# Altium PCB GSMBoard_SIM900_v2.PcbDoc
Units mm, origin at the board's own origin, x right, y up, seen from the top; angles counter-clockwise.
Board outline 39 x 39 mm, 2 copper layers (Top Layer, Bottom Layer); 39 components, 37 nets, 203 pads, 47 vias.
Unrouted connection lines stored in the file: 75.
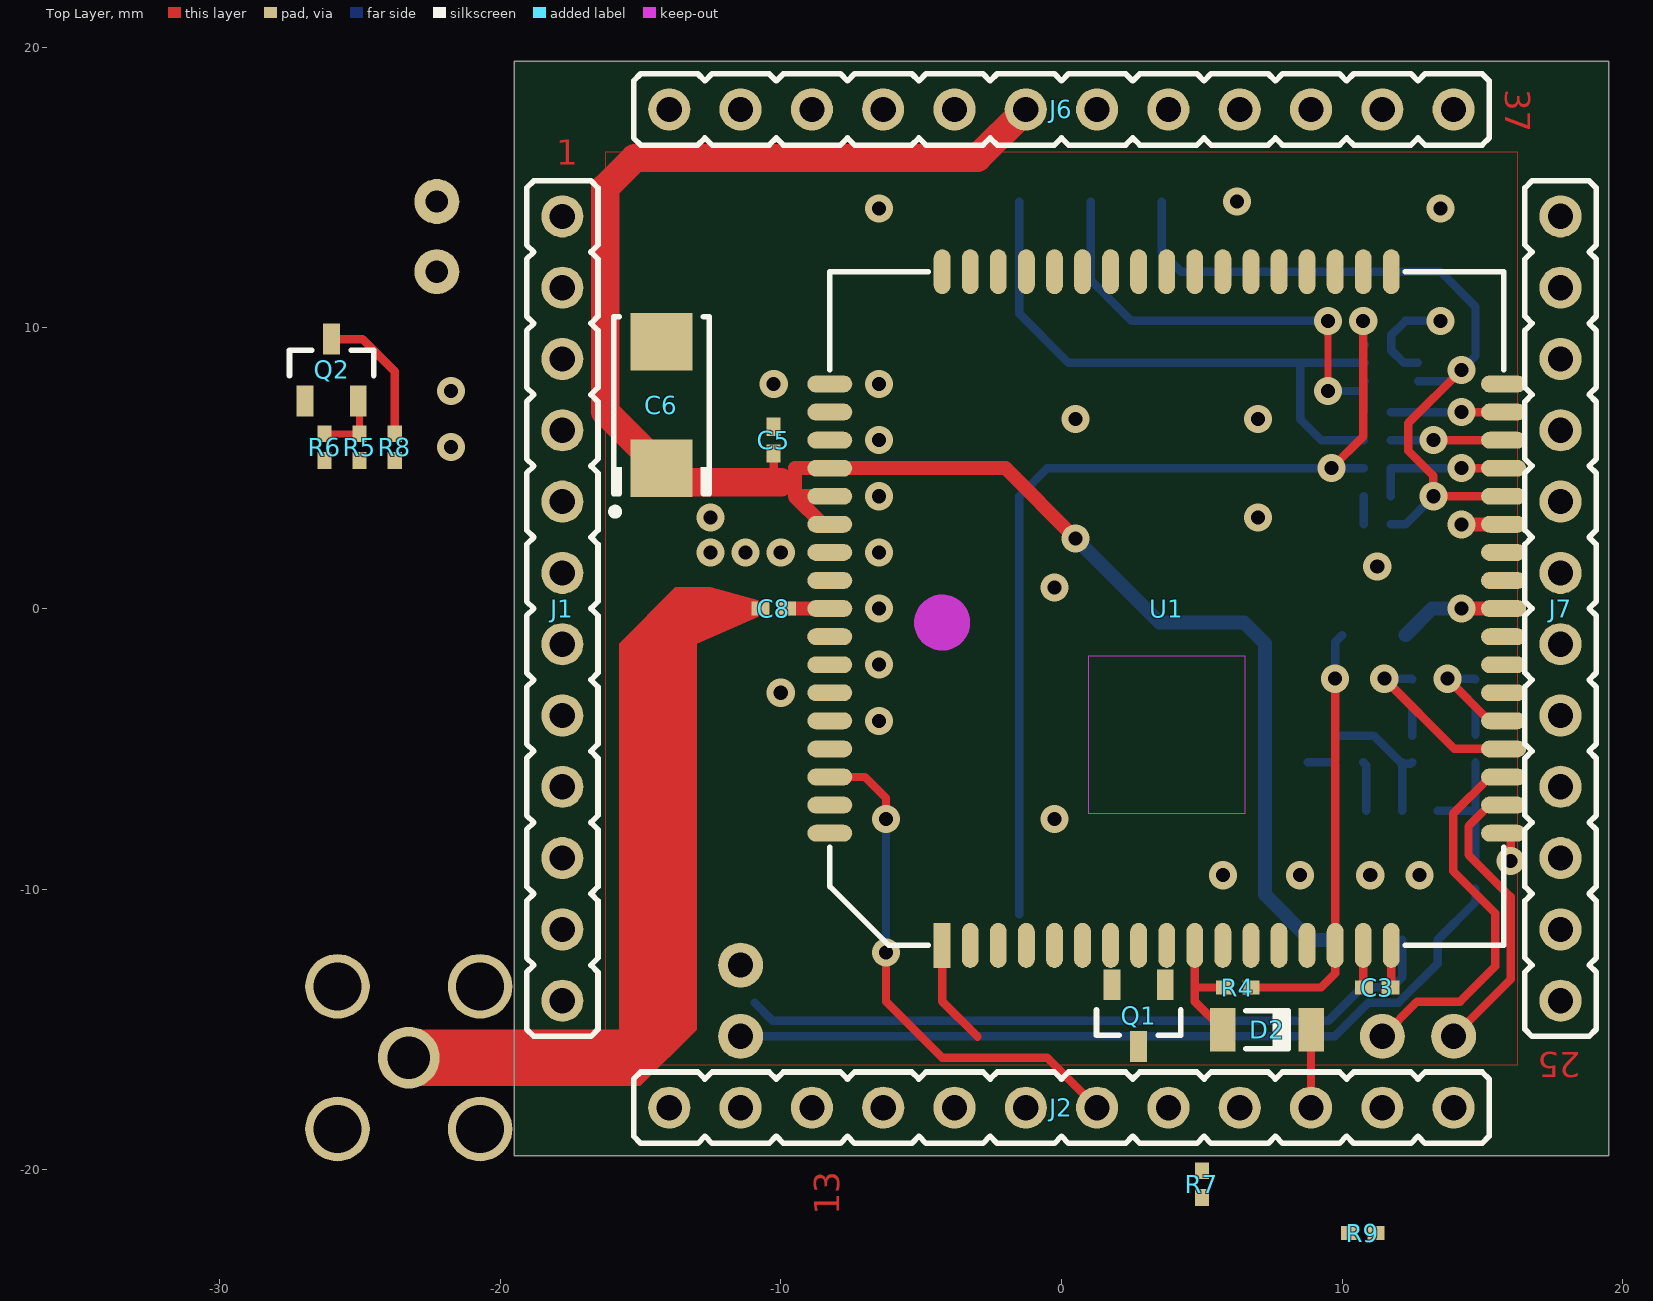
[diagram p0: Top Layer view]
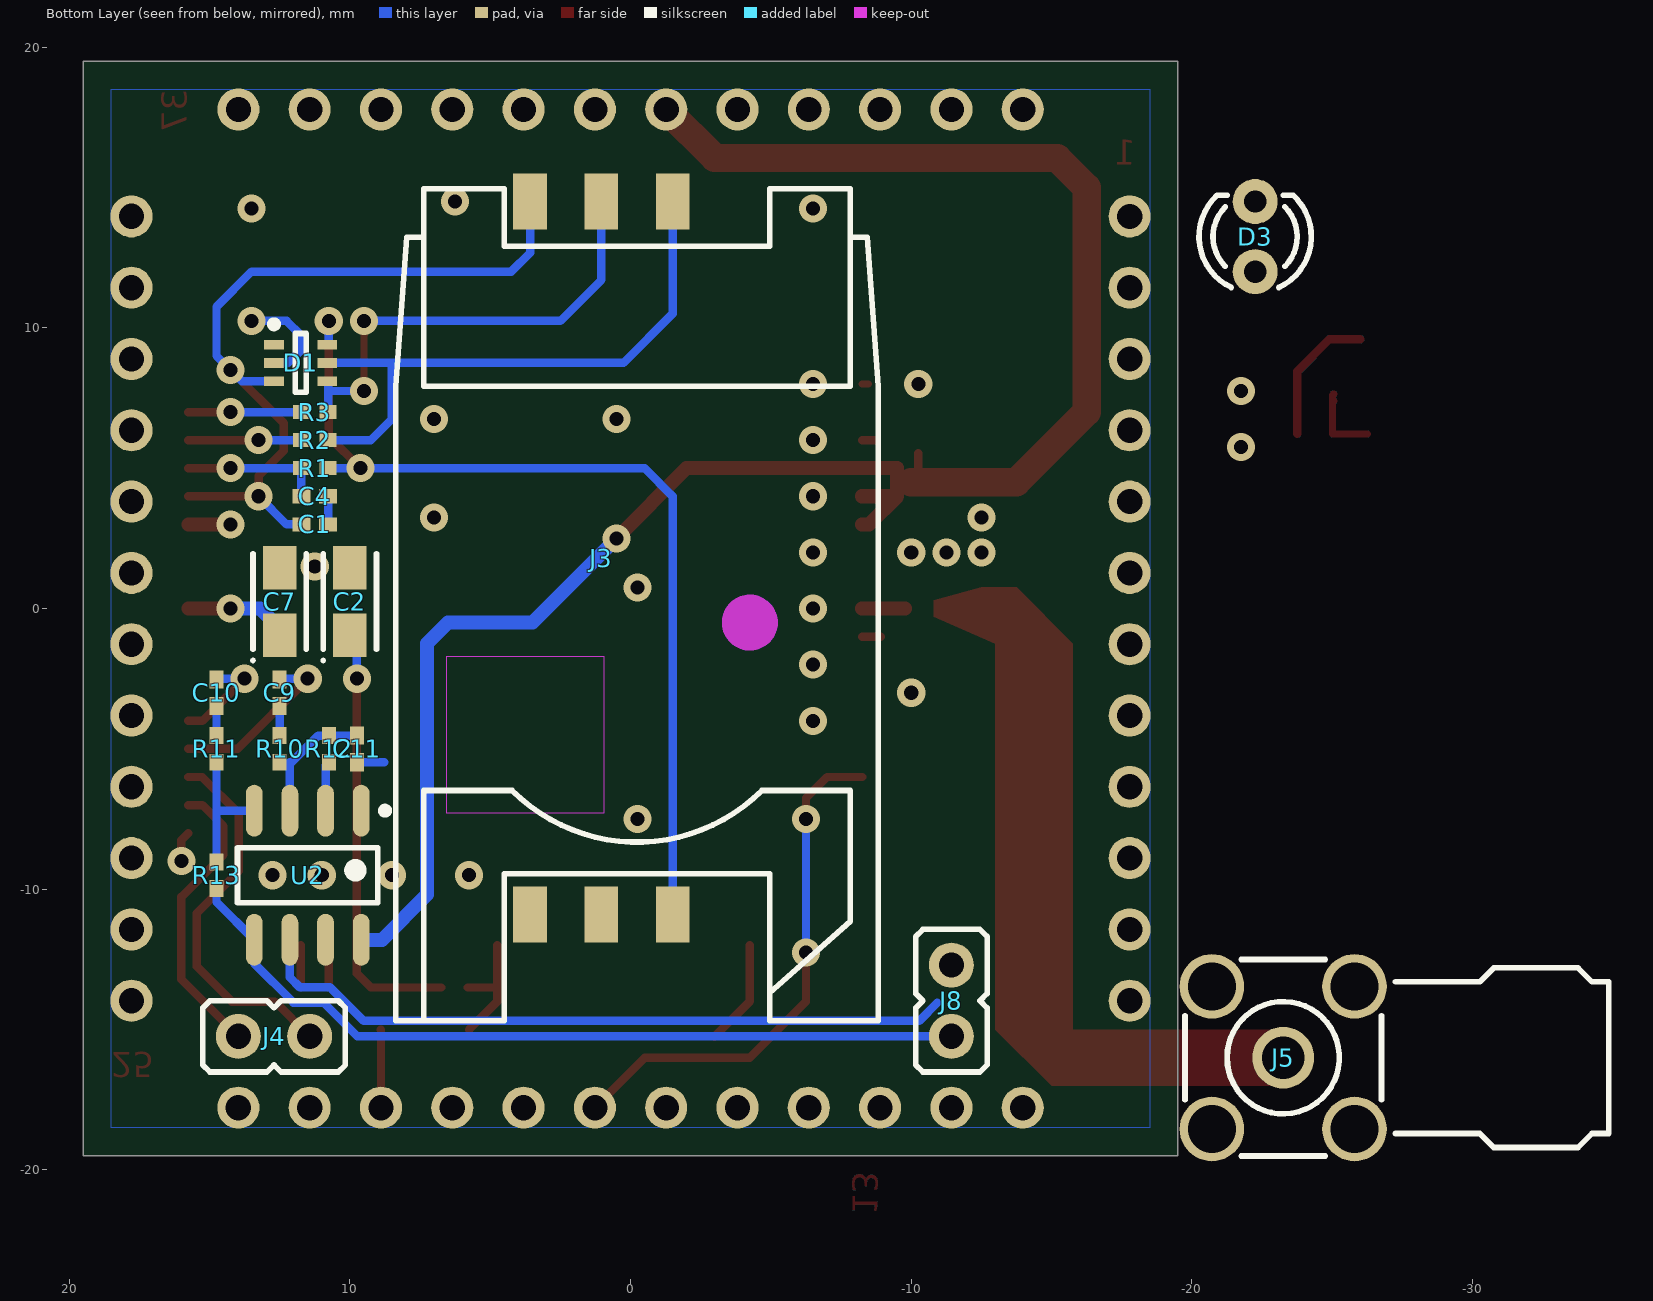
[diagram p1: Bottom Layer view, seen from below]

## Layer stack, top to bottom
Top Solder: solder mask 0.0102, Solder Resist, Dk 3.5
Top Layer: signal copper 0.0356
Dielectric 1: dielectric 0.32, FR-4, Dk 4.8
Bottom Layer: signal copper 0.0356
Bottom Solder: solder mask 0.0102, Solder Resist, Dk 3.5

## Board outline
-19.5,-19.5 -19.5,19.5 19.5,19.5 19.5,-19.5

## Design rules (kind name [scope] priority, off if disabled: settings)
Clearance Clearance_GND_GND [InPolygon and InNet('GND') vs IsTrack and InNet('GND')] p1: gap=0
Clearance Clearance_Polygon(GND) [InPolygon and InNet('GND')] p2: gap=0.5
Clearance [All] p3: gap=0.25
PolygonConnect PolygonConnect_Via(GND) [InNet('GND') vs IsVia] p1: connectstyle=Direct reliefconductorwidth=0.254 reliefentries=4 polygonreliefangle="90 Angle" airgapwidth=0.254
PolygonConnect [All] p2: connectstyle=Relief reliefconductorwidth=0.254 reliefentries=4 polygonreliefangle="90 Angle" airgapwidth=0.254
RoutingVias [All] p1: holewidth=0.5 width=1 viastyle="Through Hole" minholewidth=0.5 minwidth=1 maxholewidth=1.5 maxwidth=2
SolderMaskExpansion [All] p1: expansion=0.102
Width [All] p1: maxlimit=3 minlimit=0.25 preferedwidth=0.3
29 further rules are at their usual default settings.

## Components (designator, comment, footprint, x,y, rotation, side; value= is the part's Value field where it differs from the comment)
C1 "0.1/25" CAP0402 11.25,3 r0 bottom
C2 "10/6.3" SMA 10,0.25 r90 bottom
C3 "0.1/25" CAP0402 11.25,-13.5 r180 top
C4 "22/25" CAP0402 11.25,4 r0 bottom
C5 "0.1/25" CAP0402 -10.25,6 r270 top
C6 "220/6.3" SMC -14.25,7.25 r90 top
C7 "10/6.3" SMA 12.5,0.25 r90 bottom
C8 "100/25" CAP0402 -10.25,0 r180 top
C9 "1.0/25" CAP0402 12.5,-3 r270 bottom
C10 "1.0/25" CAP0402 14.75,-3 r270 bottom
C11 "1.0/25" CAP0402 9.75,-5 r90 bottom
D1 "SMF05C" SOT363 11.75,8.75 r180 bottom
D2 "LL4148" SOD80 7.325,-15 r180 top
D3 "L-314" "LED 3mm" -22.25,13.25 r90 bottom
J1 "LEFT" PLS-12 -17.78,0 r270 top
J2 "BOTTOM" PLS-12 0,-17.78 r0 top
J3 "SIM0424" SIM0424 -0.23,14.5 r90 bottom
J4 "MIC" PLS-2 12.7,-15.24 r180 bottom
J5 "SMA-F/A" SMA-F/A -23.25,-16 r270 bottom
J6 "TOP" PLS-12 0,17.78 r180 top
J7 "RIGHT" PLS-12 17.78,0 r90 top
J8 "SPEAKER" PLS-2 -11.43,-13.97 r270 bottom
Q1 "BC846" SOT23 2.75,-14.5 r270 top
Q2 "BC846" SOT23 -26,8.5 r90 top
R1 "22" RES0402 11.25,5 r180 bottom
R2 "22" RES0402 11.25,6 r180 bottom
R3 "22" RES0402 11.25,7 r180 bottom
R4 "10k" RES0402 6.275,-13.5 r180 top
R5 "4.7k" RES0402 -25,5.75 r270 top
R6 "47k" RES0402 -26.25,5.75 r270 top
R7 "10k" RES0402 5,-20.5 r90 top
R8 "1k" RES0402 -23.75,5.75 r90 top
R9 "10k" RES0402 10.725,-22.25 r180 top
R10 "5k6" RES0402 12.5,-5 r90 bottom
R11 "5k6" RES0402 14.75,-5 r90 bottom
R12 "20k" RES0402 10.75,-5 r90 bottom
R13 "20k" RES0402 14.75,-9.5 r90 bottom
U1 "SIM900R" SIM900_quad68 -4.25,-12 r90 top
U2 "LM4862" SO8 11.5,-9.5 r270 bottom

## Footprints (in the part's own frame and the unit in brackets; to place one, negate y for a bottom-side part, rotate by r counter-clockwise, add the part's x,y. Pads: shape width x height; smd on the part's side, far side on the other; paste and mask are expansions set on the pad)
CAP0402 [mm]
  rect 0.65x0.5 smd: 1(-0.475,0) 2(0.475,0)
  body extent -0.55,-0.3 0.55,0.3, height 0.5
"LED 3mm" [mm] "3 mm diameter LED"
  round 1.6 hole 0.8: 1(1.25,0) 2(-1.25,0)
  silkscreen extent -1.81,-2 1.47,2
PLS-2 [mm] "2-pin interboard connector, pitch 2.54 mm"
  round 1.6 hole 0.9: 1(-1.27,0) 2(1.27,0)
  silkscreen extent -2.54,-1.27 2.54,1.27, body extent -2.54,-1.27 2.54,1.27, height 8.8
PLS-12 [mm] "12-pin interboard connector, pitch 2.54 mm"
  round 1.5 hole 0.9: 1(-13.97,0) 2(-11.43,0) 3(-8.89,0) 4(-6.35,0) 5(-3.81,0) 6(-1.27,0) 7(1.27,0) 8(3.81,0) 9(6.35,0) 10(8.89,0) 11(11.43,0) 12(13.97,0)
  silkscreen extent -15.24,-1.27 15.24,1.27, body extent -15.24,-1.27 15.24,1.27, height 8.8
RES0402 [mm]
  rect 0.6x0.5 smd: 1(-0.475,0) 2(0.475,0)
  body extent -0.53,-0.28 0.53,0.28, height 0.35
SIM0424 [mm] "6-pin SIM card holder"
  rect 2x1.2 smd: 1(0,3.81) 2(0,1.27) 3(0,-1.27) 4(-25.4,3.81) 5(-25.4,1.27) 6(-25.4,-1.27)
  silkscreen extent -29.19,-8.6 0.46,8.6, body extent -29.2,-8.6 0.38,8.6, height 2.5
SIM900_quad68 [mm] "SIM900 68-pin SoP"
  rect 1.6x0.6 smd: 1(0,0)
  oval 1.6x0.6 smd: 2(0,-1) 3(0,-2) 4(0,-3) 5(0,-4) 6(0,-5) 7(0,-6) 8(0,-7) 9(0,-8) 10(0,-9) 11(0,-10) 12(0,-11) 13(0,-12) 14(0,-13) 15(0,-14) 16(0,-15) 17(0,-16) 35(24,-16) 36(24,-15) 37(24,-14) 38(24,-13) 39(24,-12) 40(24,-11) 41(24,-10) 42(24,-9) 43(24,-8) 44(24,-7) 45(24,-6) 46(24,-5) 47(24,-4) 48(24,-3) 49(24,-2) 50(24,-1) 51(24,0)
  oval 0.6x1.6 smd: 18(4,-20) 19(5,-20) 20(6,-20) 21(7,-20) 22(8,-20) 23(9,-20) 24(10,-20) 25(11,-20) 26(12,-20) 27(13,-20) 28(14,-20) 29(15,-20) 30(16,-20) 31(17,-20) 32(18,-20) 33(19,-20) 34(20,-20) 52(20,4) 53(19,4) 54(18,4) 55(17,4) 56(16,4) 57(15,4) 58(14,4) 59(13,4) 60(12,4) 61(11,4) 62(10,4) 63(9,4) 64(8,4) 65(7,4) 66(6,4) 67(5,4) 68(4,4)
  Keep-Out Layer circle w1: c11.5,0 r0.5
  Keep-Out Layer region: 4.7,-10.8 10.3,-10.8 10.3,-5.2 4.7,-5.2
  silkscreen extent 0,-20 24,4, body extent 0,-20 24,4, height 3
SMA [mm] "Surface mount package, size A"
  rect 1.55x1.2 smd: 1(1.2,0) 2(-1.2,0)
  silkscreen extent -2.15,-0.95 1.7,1, body extent -1.7,-0.9 1.7,0.9, height 1.8
SMA-F/A [mm] "Angle SMA female connector"
  round 2.2 hole 1.5: 1(0,0)
  round 2.3 hole 1.7: 2(-2.54,-2.54) 2(-2.54,2.54) 2(2.54,-2.54) 2(2.54,2.54)
  silkscreen extent -3.5,-3.5 3.5,11.6, body extent -3.5,-3.5 3.5,11.6, height 10
SMC [mm] "Surface mount package, size C"
  rect 2.05x2.2 smd: 1(2.25,0) 2(-2.25,0)
  silkscreen extent -3.92,-1.7 3.15,1.77, body extent -3.1,-1.7 3.1,1.7, height 2.8
SO8 [mm] "SOIC, 8-Leads, Body 4,90x3,90mm, Pitch 1,27mm, IPC High Density"
  oval 1.85x0.6 smd: 1(-2.3,1.905) 2(-2.3,0.635) 3(-2.3,-0.635) 4(-2.3,-1.905) 5(2.3,-1.905) 6(2.3,-0.635) 7(2.3,0.635) 8(2.3,1.905)
  silkscreen extent -2.42,-2.5 0.97,2.88, body extent -3,-2.54 3,2.54, height 1.7
SOD80 [mm]
  rect 0.9x1.55 smd: 1(-1.575,0) 2(1.575,0)
  silkscreen extent -0.75,-0.67 0.75,0.68, body extent -1.85,-0.8 1.85,0.8, height 1.61
SOT23 [mm]
  rect 1.1x0.6 smd: 1(-1.1,0.95) 2(-1.1,-0.95) 3(1.1,0)
  silkscreen extent -0.2,-1.5 0.7,1.5, body extent -1.15,-1.5 1.15,1.5, height 1.1
SOT363 [mm] "SOT363 also known as SC-70 6L, SC-88"
  rect 0.7x0.35 smd: 1(-0.95,0.65) 2(-0.95,0) 3(-0.95,-0.65) 4(0.95,-0.65) 5(0.95,0) 6(0.95,0.65)
  silkscreen extent -1.08,-1.05 0.2,1.5, body extent -0.67,-1.05 0.67,1.05, height 1.1

## Part data
C1 C3 C4 C5 C8 C9 C10 C11: library part CAP0402, "Ceramic chip capacitor 0402"
C2 C7: library part TAJA, "Standard tantalum SMT capacitor, size A"
C6: library part TAJC, "Standard tantalum SMT capacitor, size C"
D1: "5-line TVS Array for ESD and Latch-Up Protection"
D2: "Small Signal Diode"
D3: "3-mm LED"
J1 J2 J6 J7: library part PLS-12, "12-pin header, pitch 2.54 mm"
J3: "6-pin SIM card holder"
J4 J8: library part PLS-2, "2-pin header, pitch 2.54 mm"
J5: "Angle SMA female connector"
Q1 Q2: "NPN Silicon AF Transistor"
R1 R2 R3 R4 R5 R6 R7 R8 R9 R10 R11 R12 R13: library part RES0402, "Ceramic chip resistor"
U1: "GSM module; 2G; 1800MHz,900MHz; 85.6kbps; I2C, UART; 3.4A@4.5VDC"
U2: "Audio Power Amplifier with Shutdown Mode"

## Via types
v1: diameter 1, hole 0.5, Top Layer to Bottom Layer, 47 vias

## Nets (pads, with @x,y where several pads share a name; then routed paths per layer and width w, separated by ;. In a path a pad name is that pad's centre, name@x,y a point inside that pad or via, vN(x,y) a via of type N, cw(c..) or ccw(c..) an arc to the next point about the centre after c; other vN are vias at no path point)
ANT: C8.2 J5.1
GND: C1.1 C2.1 C3.1 C4.1 C5.1 C6.1 C7.1 C11.1 D1.2 J1.12 J2.12 J3.4 J5.2 J6.12 J7.12 Q2.1 R6.2 U1.17 U1.18 U1.29 U1.39 U1.45 U1.46 U1.53 U1.54 U1.58 U1.59 U1.61 U1.62 U1.63 U1.64 U1.65 U2.7 | length 11.5
  Top Layer w0.3: U1.61@-8.92,-1 U1.61 ; U1.54@-8.75,6 U1.54 ; C3.1 11.75,-13.475 U1.17 ; U1.18 16,-8.25 16,-8.75 16.25,-9 v1(16,-9)
  Top Layer w0.5: v1(14.25,3) U1.29
  Bottom Layer w0.3: 8.775,-5.475 C11.1 ; C1.1 C4.1 ; D1.2 12.2,8.75 11.75,9.2 11.75,9.75 12.25,10.25 v1(13.5,10.25) ; v1(16,-9) v1@16.25,-9
  other v1: 5.75,-9.5 8.5,-9.5 11,-9.5 12.75,-9.5 -0.25,-7.5 -6.5,-4 -10,-3 -6.5,-2 -6.5,0 -0.25,0.75 11.25,1.5 -12.5,2 -11.25,2 -10,2 -6.5,2 -12.5,3.25 7,3.25 -6.5,4 -21.75,5.75 -6.5,6 0.5,6.75 7,6.75 -21.75,7.75 -10.25,8 -6.5,8 -6.5,14.25 13.5,14.25 6.25,14.5
GSM_POWERKEY: J2.8 U1.1 | length 3.8
  Top Layer w0.3: U1.1 -4.25,-13.99 -2.99,-15.25
GSM_RXD: D2.1 J2.10 | length 2.8
  Top Layer w0.3: J2.10 8.89,-15.01 D2.1
GSM_STATUS: J2.7 U1.66 | length 18.6
  Top Layer w0.3: U1.66 -7,-6 -6.25,-6.75 v1(-6.25,-7.5) ; v1(-6.25,-12.25) -6.25,-14 -4.25,-16 -0.51,-16 J2.7
  Bottom Layer w0.3: v1(-6.25,-12.25) v1(-6.25,-7.5)
GSM_TXD: J2.11 Q1.3 R9.2
NetC1_2: C1.2 D1.3 J3.1 U1.30 | length 28.1
  Top Layer w0.3: v1(14.25,8.5) 12.35,6.6 12.35,5.627 13.25,4.727 v1(13.25,4) U1.30
  Bottom Layer w0.3: J3.1 3.58,12.67 4.25,12 13.5,12 14.75,10.75 14.75,9 v1(14.25,8.5) 13.85,8.1 D1.3 ; C1.2 12.25,3 v1(13.25,4)
NetC3_2: C3.2 U1.16 | length 1.5
  Top Layer w0.3: U1.16 10.75,-13.475 C3.2
NetC4_2: C4.2 R1.1 U1.31 | length 5
  Top Layer w0.3: v1(14.25,5) U1.31
  Bottom Layer w0.3: C4.2 R1.1 v1(14.25,5)
NetC7_2: C7.2 U1.26 | length 3.9
  Top Layer w0.5: v1(14.25,0) U1.26
  Bottom Layer w0.5: C7.2@12.25,-0.95 13.2,0 v1(14.25,0)
NetC8_1: C8.1 U1.60 | length 1.5
  Top Layer w0.5: C8.1 U1.60
NetC9_2: C9.2 R10.2 | length 1.1
  Bottom Layer w0.3: R10.2 C9.2
NetC10_2: C10.2 R11.2 | length 1
  Bottom Layer w0.3: R11.2@14.75,-4.5 C10.2
NetC11_2: C11.2 R10.1 R12.2 U2.3 | length 4.8
  Bottom Layer w0.3: C11.2 R12.2 11.125,-4.525 12.075,-5.475 12.135,-5.475 ; U2.3 12.135,-5.535 12.44,-5.535 R10.1
NetD1_4: D1.4 J3.2 R3.2 | length 16.8
  Top Layer w0.25: v1(9.5,7.75) 9.5,9.732 9.482,9.75 9.5,9.768 v1(9.5,10.25)
  Bottom Layer w0.3: J3.2 1.04,11.71 2.5,10.25 v1(9.5,10.25) ; v1(9.5,7.75) 10.775,7.75 ; R3.2 10.775,7.75 ; D1.4 10.775,8.075 10.775,7.75
NetD1_5: D1.5 J3.3 R2.2 | length 21.6
  Bottom Layer w0.3: J3.3 -1.5,10.5 0.25,8.75 8.5,8.75 ; R2.2 9.25,6 8.5,6.75 8.5,8.75 ; D1.5 8.5,8.75
NetD1_6: D1.6 J3.6 R1.2 | length 34.2
  Top Layer w0.3: v1(9.62,5) 10.75,6.13 v1(10.75,10.25)
  Bottom Layer w0.3: J3.6 -1.5,4 -0.5,5 v1(9.62,5) R1.2 ; v1(10.75,10.25) 10.75,9.45 D1.6
NetD2_2: D2.2 R4.2 U1.10 | length 4.5
  Top Layer w0.3: U1.10 4.75,-13.5 ; D2.2 4.75,-14 4.75,-13.5 ; R4.2 4.75,-13.5
NetD3_1: D3.1 R8.1
NetJ4_1: J4.1 U1.19 | length 10.5
  Top Layer w0.3: J4.1 16,-13.21 16,-10.273 14.5,-8.773 14.5,-7.75 15.25,-7 U1.19
NetJ4_2: J4.2 U1.20 | length 13.5
  Top Layer w0.3: J4.2 12.67,-14 14.2,-14 15.45,-12.75 15.45,-10.85 13.95,-9.35 13.95,-7.31 15.26,-6 U1.20
NetJ8_1: J8.1 U2.6 | length 25.3
  Bottom Layer w0.3: -10.933,-14.04 -10.283,-14.69 9.505,-14.69 10.705,-13.49 11.782,-13.49 12.135,-13.137 U2.6
NetJ8_2: J8.2 R13.1 U2.5 | length 29.1
  Bottom Layer w0.3: J8.2 9.733,-15.24 10.933,-14.04 12.01,-14.04 13.405,-12.645 U2.5 14.75,-10.455 R13.1
NetQ1_1: Q1.1 U1.9
NetQ1_2: Q1.2 R7.2
NetQ2_2: Q2.2 R5.1 R6.1 | length 2.8
  Top Layer w0.25: R6.1 R5.1 Q2.2@-25,7.35 ; Q2.2 Q2.2@-25,7.35 ; Q2.2@-25.05,7.65 -25,7.6 Q2.2@-25,7.35
NetQ2_3: Q2.3 R8.2 | length 5
  Top Layer w0.3: Q2.3 -24.9,9.6 -23.75,8.45 R8.2
NetR2_1: R2.1 U1.32 | length 4
  Top Layer w0.3: v1(13.25,6) U1.32
  Bottom Layer w0.3: R2.1 v1(13.25,6)
NetR3_1: R3.1 U1.33 | length 4
  Top Layer w0.3: v1(14.25,7) U1.33
  Bottom Layer w0.3: R3.1 v1(14.25,7)
NetR5_2: R5.2 U1.52 | length 0.2
  Top Layer w0.25: U1.52@-8.475,8 U1.52
NetR11_1: R11.1 R13.2 U2.4 | length 4.9
  Bottom Layer w0.3: U2.4 14.75,-7.2 ; R13.2 14.75,-7.2 ; R11.1 14.75,-7.2
NetR12_1: R12.1 U2.2 | length 1.8
  Bottom Layer w0.3: R12.1 10.865,-5.59 U2.2
SPK_N: C10.1 U1.22 | length 3.6
  Top Layer w0.3: v1(13.75,-2.5) 15.25,-4 U1.22
  Bottom Layer w0.3: v1(13.75,-2.5) 14.725,-2.5 C10.1
SPK_P: C9.1 U1.21 | length 6.3
  Top Layer w0.3: v1(11.5,-2.5) 14,-5 U1.21
  Bottom Layer w0.3: v1(11.5,-2.5) 12.475,-2.5 C9.1
VBAT: C5.2 C6.2 D3.2 J6.7 U1.55 U1.56 U1.57 U2.8 | length 68.3
  Top Layer w0.3: C5.2 -10.25,4.75 -10,4.5
  Top Layer w0.5: -10,4.5 -9.5,4.5 ; U1.57 -8.5,3 -9.5,4 ; U1.56 -9.5,4 ; v1(0.5,2.5) -2,5 U1.55 -9.5,5 -9.5,4.5 ; -9.5,4 -9.5,4.5
  Top Layer w1: -10,4.5 -13.75,4.5 C6.2 -16.25,7 -16.25,12 -16.25,15 -15.2,16.05 -3,16.05 J6.7
  Bottom Layer w0.5: v1(0.5,2.5) 3.5,-0.5 6.5,-0.5 7.25,-1.25 7.25,-10.193 8.857,-11.8 U2.8
VCC: J1.1 J2.1 J6.1 J7.1 R7.1 R9.1
VEXT: C2.2 R4.1 U1.15 | length 15.4
  Top Layer w0.3: R4.1 9.25,-13.5 9.75,-13 U1.15 9.75,-6.75 v1(9.75,-2.5)
  Bottom Layer w0.3: v1(9.75,-2.5) 9.75,-1.2 C2.2
pads on no net: D1.1 J1.2 J1.3 J1.4 J1.5 J1.6 J1.7 J1.8 J1.9 J1.10 J1.11 J2.2 J2.3 J2.4 J2.5 J2.6 J2.9 J3.5 J6.2 J6.3 J6.4 J6.5 J6.6 J6.8 J6.9 J6.10 J6.11 J7.2 J7.3 J7.4 J7.5 J7.6 J7.7 J7.8 J7.9 J7.10 J7.11 U1.2 U1.3 U1.4 U1.5 U1.6 U1.7 U1.8 U1.11 U1.12 U1.13 U1.14 U1.23 U1.24 U1.25 U1.27 U1.28 U1.34 U1.35 U1.36 U1.37 U1.38 U1.40 U1.41 U1.42 U1.43 U1.44 U1.47 U1.48 U1.49 U1.50 U1.51 U1.67 U1.68 U2.1

## Polygon pours and split planes (outlines as drawn)
GND on Top Layer "Top-GND" (solid, remove dead copper, shelved, pour order 2): -16.25,16.25 -16.25,-16.25 16.25,-16.25 16.25,16.25
GND on Bottom Layer "Bottom-GND" (solid, remove dead copper, shelved, pour order 2): -18.5,18.5 -18.5,-18.5 18.5,-18.5 18.5,18.5

## Other copper
Top Layer:
  region net ANT: -10.8,0.3 -10.8,-0.3 -13,-1.25 -13,-15 -15,-17 -23.25,-17 -23.25,-15 -15.75,-15 -15.75,-1.25 -13.75,0.75 -12.5,0.75
  text "37" at 15.5,18.5 h1.52 r270
  text "1" at -18,15.5 h1.52
  text "25" at 18.5,-15.5 h1.52 r180
  text "13" at -7.62,-21.59 h1.52 r90
Bottom Layer:
  pour cut-out: -1,16 3,16 3,13.5 -1,13.5

## Silkscreen, mask and mechanical layers (free items; w line width, h text height)
Board:
  the board outline again, w0.2